# Altium PCB ADAS_ECU_MB_revA.PcbDoc (part 5 of 5)
Units mm, origin at the board's own origin, x right, y up, seen from the top; angles counter-clockwise.
Board outline 180 x 120 mm, 6 copper layers (Top Layer, Mid Layer 1, Mid Layer 2, Mid Layer 3, Mid Layer 4, Bottom Layer), stack 1.554 mm thick; 452 components, 370 nets, 4018 pads, 80 vias.
Unrouted connection lines stored in the file: 869.
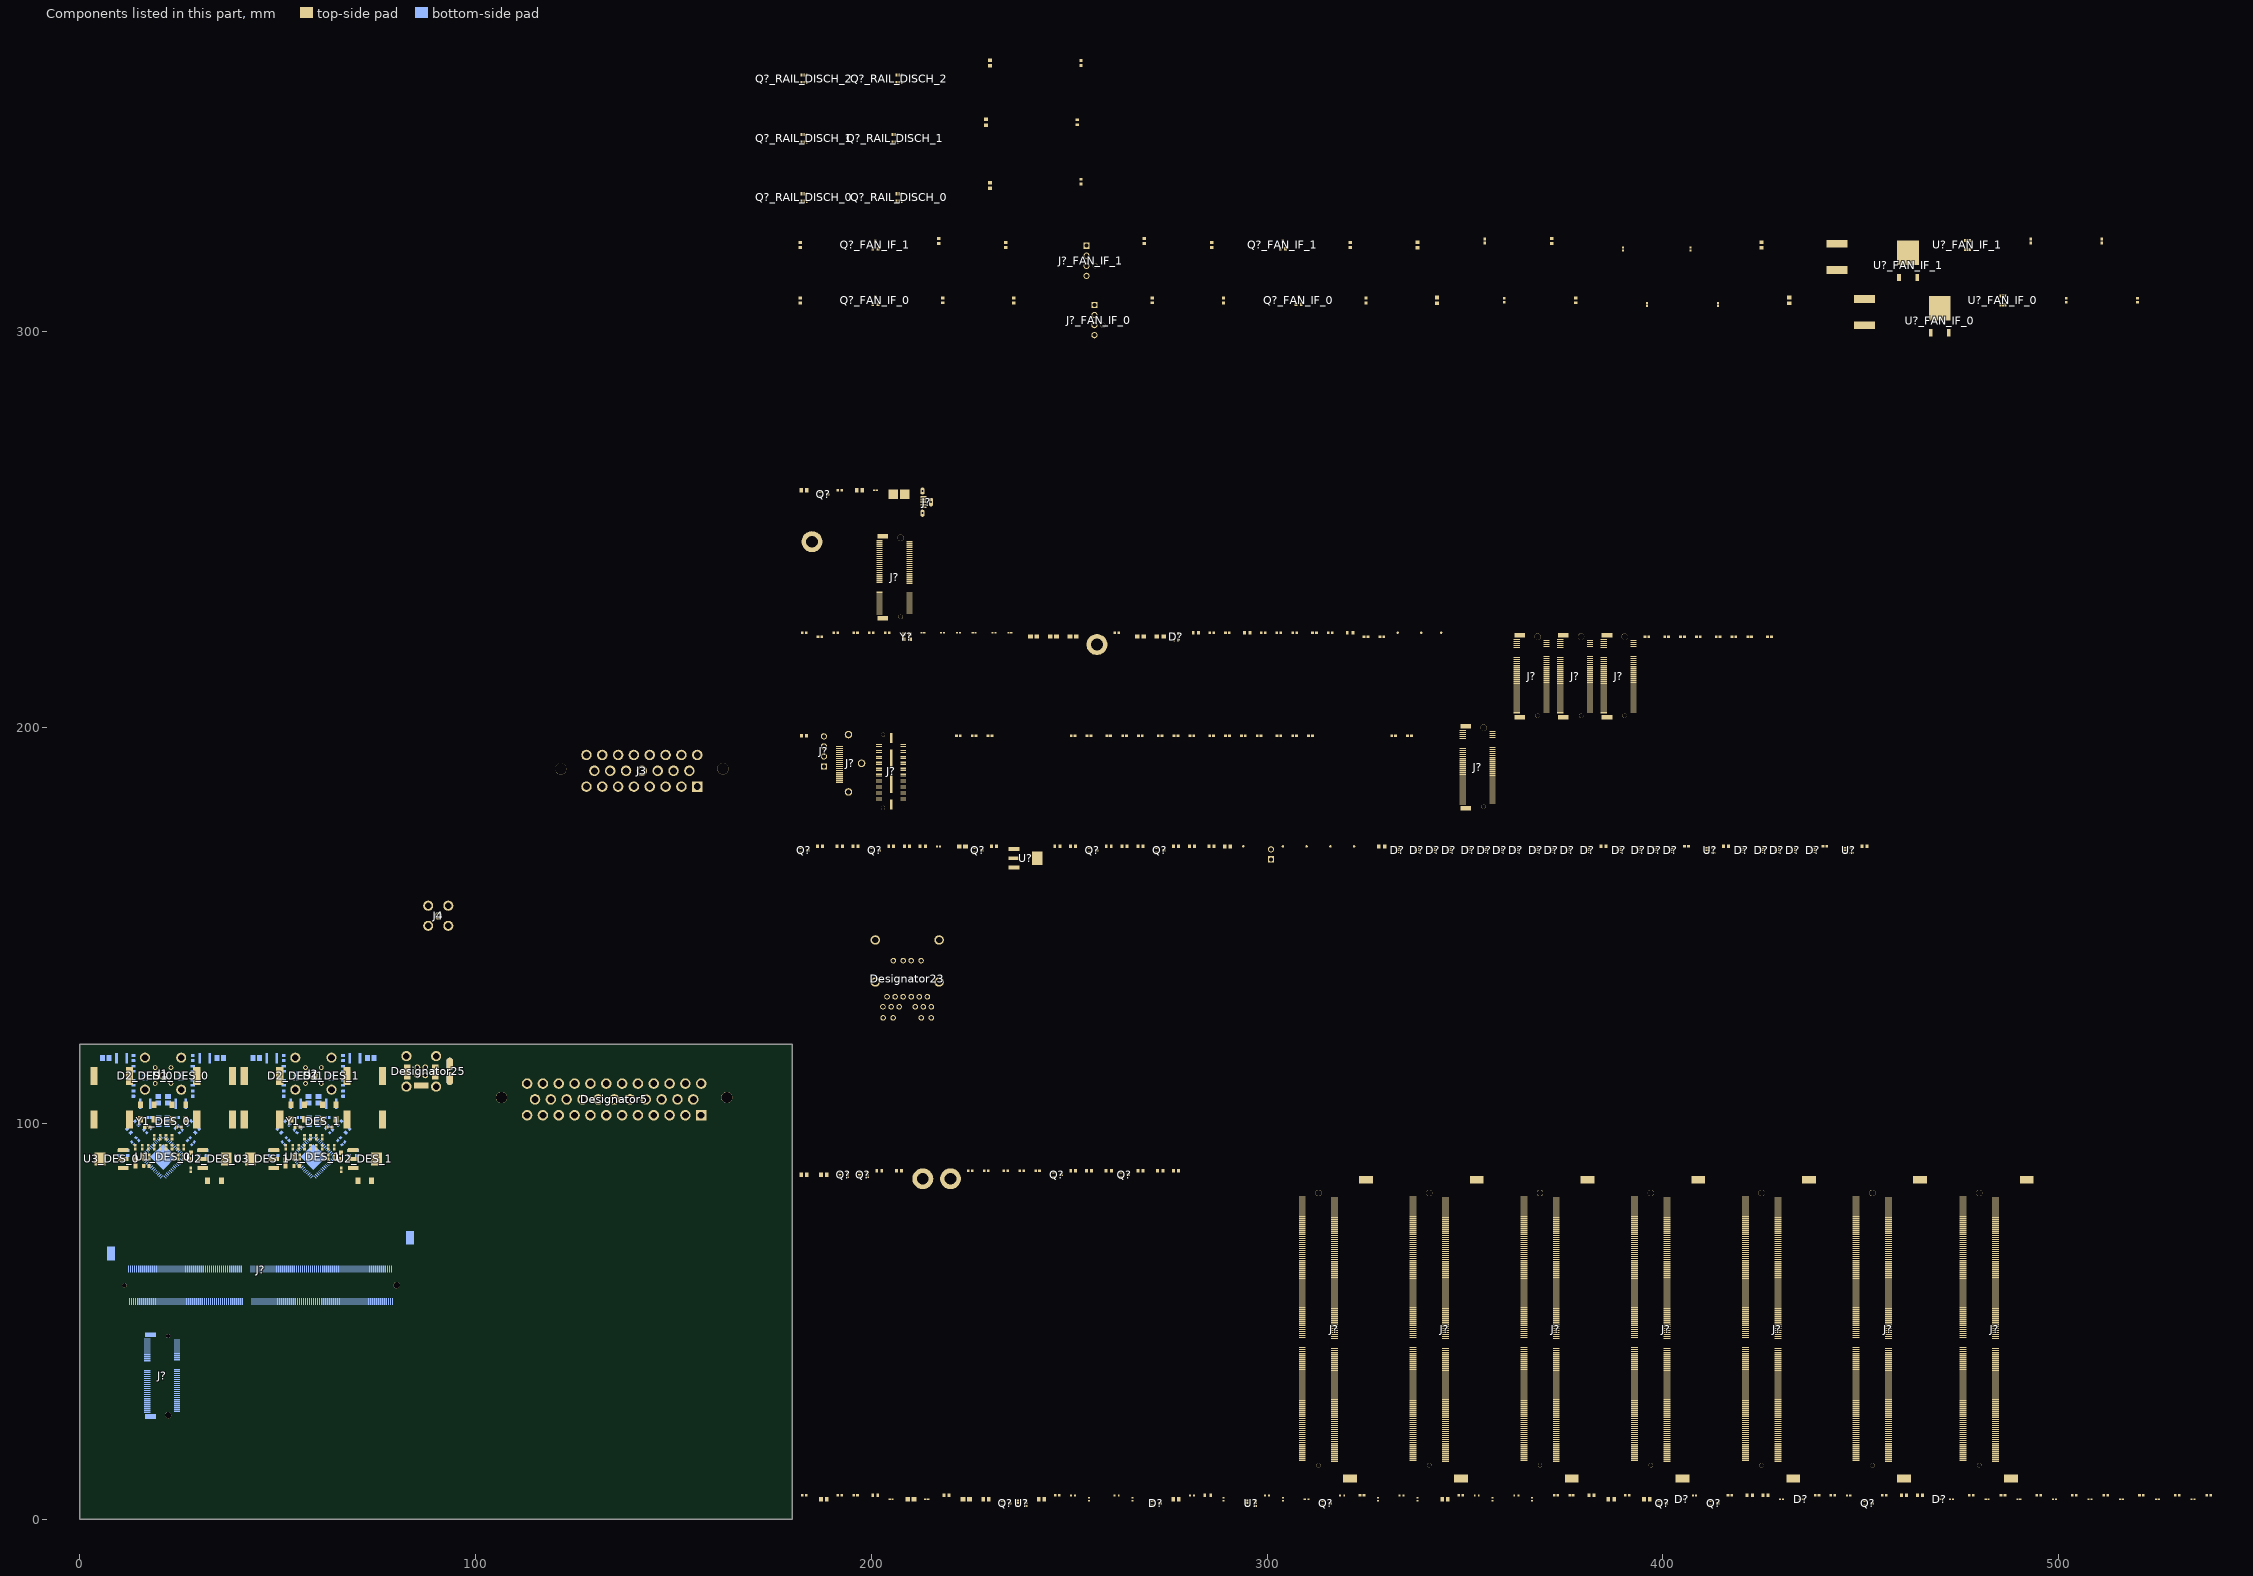
[diagram p4: the components of this part, seen from the top]

## Via types
v1: diameter 0.5, hole 0.2, Top Layer to Bottom Layer, 32 vias
v2: diameter 0.5, hole 0.3, Top Layer to Bottom Layer, 30 vias
v3: diameter 0.7, hole 0.5, Top Layer to Bottom Layer, 16 vias
v4: diameter 1.2, hole 1.2, Top Layer to Bottom Layer, 2 vias

## Nets (pads, with @x,y where several pads share a name; then routed paths per layer and width w, separated by ;. In a path a pad name is that pad's centre, name@x,y a point inside that pad or via, vN(x,y) a via of type N, cw(c..) or ccw(c..) an arc to the next point about the centre after c; other vN are vias at no path point) (continued)
pads on no net: C?.1@186.522,223 C?.1@221.522,198 C?.1@225.522,198 C?.1@229.522,198 C?.1@250.522,198 C?.1@254.522,198 C?.1@259.522,198 C?.1@263.522,198 C?.1@267.522,198 C?.1@272.522,198 C?.1@276.522,198 C?.1@280.522,198 C?.1@285.522,198 C?.1@289.522,198 C?.1@293.522,198 C?.1@297.522,198 C?.1@302.522,198 C?.1@306.522,198 C?.1@310.522,198 C?.1@324.522,223 C?.1@328.522,223 C?.1@331.522,198 C?.1@335.522,198 C?.1@395.522,223 C?.1@400.522,223 C?.1@404.522,223 C?.1@407.6,6 C?.1@408.522,223 C?.1@413.522,223 C?.1@417.522,223 C?.1@421.522,223 C?.1@426.522,223 C?.2@222.479,198 C?.2@226.479,198 C?.2@230.479,198 C?.2@251.479,198 C?.2@255.479,198 C?.2@260.479,198 C?.2@264.479,198 C?.2@268.479,198 C?.2@273.479,198 C?.2@277.479,198 C?.2@281.479,198 C?.2@286.479,198 C?.2@290.479,198 C?.2@294.479,198 C?.2@298.479,198 C?.2@303.479,198 C?.2@307.479,198 C?.2@311.479,198 C?.2@332.479,198 C?.2@336.479,198 C?_FAN_IF_0.2@396,307.367 C?_FAN_IF_1.2@390,321.367 D1_DES_0.2 D1_DES_0.4 D1_DES_0.7 D1_DES_0.9 D1_DES_1.2 D1_DES_1.4 D1_DES_1.7 D1_DES_1.9 D2_DES_0.2 D2_DES_0.4 D2_DES_0.7 D2_DES_0.9 D2_DES_1.2 D2_DES_1.4 D2_DES_1.7 D2_DES_1.9 D?.1@271.05,4.65 D?.1@380.583,170 D?.2@380.583,169.5 D?.3@277.45,222.2 D?.9@381.418,169.5 D?.10@381.418,170 Designator5. Designator5.1 Designator5.2 Designator5.3 Designator5.4 Designator5.5 Designator5.6 Designator5.7 Designator5.8 Designator5.9 Designator5.10 Designator5.11 Designator5.12 Designator5.13 Designator5.14 Designator5.15 Designator5.16 Designator5.17 Designator5.18 Designator5.19 Designator5.20 Designator5.21 Designator5.22 Designator5.23 Designator5.24 Designator5.25 Designator5.26 Designator5.27 Designator5.28 Designator5.29 Designator5.30 Designator5.31 Designator5.32 Designator5.33 Designator5.34 Designator5.35 Designator23.1 Designator23.2 Designator23.3 Designator23.4 Designator23.5 Designator23.6 Designator23.7 Designator23.8 Designator23.9 Designator23.10 Designator23.11 Designator23.12 Designator23.13 Designator23.14 Designator23.15 Designator23.16 Designator23.MH1 Designator23.MH2 Designator23.MH3 Designator23.MH4 Designator23.MH5 Designator23.MH6 Designator23.U1 Designator23.U2 Designator23.U3 Designator23.U4 Designator25. Designator25.1 Designator25.2 Designator25.3 Designator25.4 Designator25.5 Designator25.6 Designator25.7 Designator25.8 Designator25.9 Designator25.10 Designator25.11 F?_FAN_IF_0.2 F?_FAN_IF_1.2 FB?.2@266,5.4 FB?.2@289,5.4 FB?.2@304,5.4 FB?.2@328,5.4 FB?.2@338,5.4 FB?.2@357,5.4 FB?.2@367,5.4 J3. J3.1 J3.2 J3.3 J3.4 J3.5 J3.6 J3.7 J3.8 J3.9 J3.10 J3.11 J3.12 J3.13 J3.14 J3.15 J3.16 J3.17 J3.18 J3.19 J3.20 J3.21 J3.22 J3.23 J4.1 J?. J?.01 J?.1@17,45.5 J?.1@202.1,228.75 J?.1@308.9,81.375 J?.1@336.9,81.375 J?.1@363.1,203.75 J?.1@364.9,81.375 J?.1@374.1,203.75 J?.1@385.1,203.75 J?.1@392.9,81.375 J?.1@420.9,81.375 J?.1@448.9,81.375 J?.1@475.901,81.375 J?.02 J?.2@24.55,45.25 J?.2@78.75,63.2 J?.2@209.65,229 J?.2@213.175,256.35 J?.2@345.1,81.125 J?.2@357,181 J?.2@373.1,81.125 J?.2@381.65,204 J?.2@392.65,204 J?.2@401.1,81.125 J?.2@429.1,81.125 J?.2@457.1,81.125 J?.2@484.101,81.125 J?.03 J?.3@17,45 J?.3@188,195.27 J?.3@191.92,194.21 J?.3@202.1,229.25 J?.3@213.175,257 J?.3@308.9,80.875 J?.3@336.9,80.875 J?.3@363.1,204.25 J?.3@364.9,80.875 J?.3@374.1,204.25 J?.3@385.1,204.25 J?.3@392.9,80.875 J?.3@420.9,80.875 J?.3@448.9,80.875 J?.3@475.901,80.875 J?.04 J?.4@24.55,44.75 J?.4@78.25,63.2 J?.4@188,197.81 J?.4@209.65,229.5 J?.4@213.175,257.65 J?.4@345.1,80.625 J?.4@357,181.5 J?.4@373.1,80.625 J?.4@381.65,204.5 J?.4@392.65,204.5 J?.4@401.1,80.625 J?.4@429.1,80.625 J?.4@457.1,80.625 J?.4@484.101,80.625 J?.05 J?.5@17,44.5 J?.5@202.1,229.75 J?.5@308.9,80.375 J?.5@336.9,80.375 J?.5@363.1,204.75 J?.5@364.9,80.375 J?.5@374.1,204.75 J?.5@385.1,204.75 J?.5@392.9,80.375 J?.5@420.9,80.375 J?.5@448.9,80.375 J?.5@475.901,80.375 J?.06 J?.6@24.55,44.25 J?.6@77.75,63.2 J?.6@209.65,230 J?.6@345.1,80.125 J?.6@357,182 J?.6@370.65,205 J?.6@373.1,80.125 J?.6@381.65,205 J?.6@392.65,205 J?.6@401.1,80.125 J?.6@429.1,80.125 J?.6@457.1,80.125 J?.6@484.101,80.125 J?.07 J?.7@17,44 J?.7@202.1,230.25 J?.7@308.9,79.875 J?.7@336.9,79.875 J?.7@363.1,205.25 J?.7@364.9,79.875 J?.7@374.1,205.25 J?.7@385.1,205.25 J?.7@392.9,79.875 J?.7@420.9,79.875 J?.7@448.9,79.875 J?.7@475.901,79.875 J?.08 J?.8@24.55,43.75 J?.8@77.25,63.2 J?.8@209.65,230.5 J?.8@345.1,79.625 J?.8@357,182.5 J?.8@370.65,205.5 J?.8@373.1,79.625 J?.8@381.65,205.5 J?.8@392.65,205.5 J?.8@401.1,79.625 J?.8@429.1,79.625 J?.8@457.1,79.625 J?.8@484.101,79.625 J?.09 J?.9@17,43.5 J?.9@77,55 J?.9@202.1,230.75 J?.9@308.9,79.375 J?.9@336.9,79.375 J?.9@363.1,205.75 J?.9@364.9,79.375 J?.9@374.1,205.75 J?.9@385.1,205.75 J?.9@392.9,79.375 J?.9@420.9,79.375 J?.9@448.9,79.375 J?.9@475.901,79.375 J?.10@24.55,43.25 J?.10@76.75,63.2 J?.10@208.09,184.75 J?.10@209.65,231 J?.10@345.1,79.125 J?.10@357,183 J?.10@373.1,79.125 J?.10@381.65,206 J?.10@392.65,206 J?.10@401.1,79.125 J?.10@429.1,79.125 J?.10@457.1,79.125 J?.10@484.101,79.125 J?.11@17,43 J?.11@76.5,55 J?.11@201.91,185.25 J?.11@202.1,231.25 J?.11@308.9,78.875 J?.11@336.9,78.875 J?.11@363.1,206.25 J?.11@364.9,78.875 J?.11@374.1,206.25 J?.11@385.1,206.25 J?.11@392.9,78.875 J?.11@420.9,78.875 J?.11@448.9,78.875 J?.11@475.901,78.875 J?.12@24.55,42.75 J?.12@76.25,63.2 J?.12@208.09,185.25 J?.12@209.65,231.5 J?.12@345.1,78.625 J?.12@357,183.5 J?.12@373.1,78.625 J?.12@381.65,206.5 J?.12@392.65,206.5 J?.12@401.1,78.625 J?.12@429.1,78.625 J?.12@457.1,78.625 J?.12@484.101,78.625 J?.13@17,42.5 J?.13@201.91,186.25 J?.13@202.1,231.75 J?.13@308.9,78.375 J?.13@336.9,78.375 J?.13@363.1,206.75 J?.13@364.9,78.375 J?.13@374.1,206.75 J?.13@385.1,206.75 J?.13@392.9,78.375 J?.13@420.9,78.375 J?.13@448.9,78.375 J?.13@475.901,78.375 J?.14@24.55,42.25 J?.14@75.75,63.2 J?.14@191.92,188.71 J?.14@208.09,186.25 J?.14@209.65,232 J?.14@345.1,78.125 J?.14@357,184 J?.14@373.1,78.125 J?.14@381.65,207 J?.14@392.65,207 J?.14@401.1,78.125 J?.14@429.1,78.125 J?.14@457.1,78.125 J?.14@484.101,78.125 J?.15@17,42 J?.15@201.91,186.75 J?.15@202.1,232.25 J?.15@308.9,77.875 J?.15@336.9,77.875 J?.15@363.1,207.25 J?.15@364.9,77.875 J?.15@374.1,207.25 J?.15@385.1,207.25 J?.15@392.9,77.875 J?.15@420.9,77.875 J?.15@448.9,77.875 J?.15@475.901,77.875 J?.16@24.55,41.75 J?.16@75.25,63.2 J?.16@208.09,186.75 J?.16@209.65,232.5 J?.16@345.1,77.625 J?.16@357,184.5 J?.16@373.1,77.625 J?.16@381.65,207.5 J?.16@392.65,207.5 J?.16@401.1,77.625 J?.16@429.1,77.625 J?.16@457.1,77.625 J?.16@484.101,77.625 J?.17@17,41.5 J?.17@201.91,187.75 J?.17@202.1,232.75 J?.17@308.9,77.375 J?.17@336.9,77.375 J?.17@363.1,207.75 J?.17@364.9,77.375 J?.17@374.1,207.75 J?.17@385.1,207.75 J?.17@392.9,77.375 J?.17@420.9,77.375 J?.17@448.9,77.375 J?.17@475.901,77.375 J?.18@24.55,41.25 J?.18@74.75,63.2 J?.18@208.09,187.75 J?.18@209.65,233 J?.18@345.1,77.125 J?.18@357,185 J?.18@373.1,77.125 J?.18@381.65,208 J?.18@392.65,208 J?.18@401.1,77.125 J?.18@429.1,77.125 J?.18@457.1,77.125 J?.18@484.101,77.125 J?.19@17,41 J?.19@201.91,188.25 J?.19@202.1,233.25 J?.19@308.9,76.875 J?.19@336.9,76.875 J?.19@363.1,208.25 J?.19@364.9,76.875 J?.19@374.1,208.25 J?.19@385.1,208.25 J?.19@392.9,76.875 J?.19@420.9,76.875 J?.19@448.9,76.875 J?.19@475.901,76.875 J?.20@24.55,40.75 J?.20@74.25,63.2 J?.20@208.09,188.25 J?.20@209.65,233.5 J?.20@345.1,76.625 J?.20@357,185.5 J?.20@370.65,208.5 J?.20@373.1,76.625 J?.20@381.65,208.5 J?.20@392.65,208.5 J?.20@401.1,76.625 J?.20@429.1,76.625 J?.20@457.1,76.625 J?.20@484.101,76.625 J?.21@17,40.5 J?.21@201.91,189.25 J?.21@202.1,233.75 J?.21@308.9,76.375 J?.21@336.9,76.375 J?.21@363.1,208.75 J?.21@364.9,76.375 J?.21@374.1,208.75 J?.21@385.1,208.75 J?.21@392.9,76.375 J?.21@420.9,76.375 J?.21@448.9,76.375 J?.21@475.901,76.375 J?.22@24.55,40.25 J?.22@73.75,63.2 J?.22@208.09,189.25 J?.22@209.65,234 J?.22@345.1,76.125 J?.22@357,186 J?.22@370.65,209 J?.22@373.1,76.125 J?.22@381.65,209 J?.22@392.65,209 J?.22@401.1,76.125 J?.22@429.1,76.125 J?.22@457.1,76.125 J?.22@484.101,76.125 J?.23@17,40 J?.23@201.91,189.75 J?.23@202.1,234.25 J?.23@308.9,75.875 J?.23@336.9,75.875 J?.23@363.1,209.25 J?.23@364.9,75.875 J?.23@374.1,209.25 J?.23@385.1,209.25 J?.23@392.9,75.875 J?.23@420.9,75.875 J?.23@448.9,75.875 J?.23@475.901,75.875 J?.24@73.25,63.2 J?.24@208.09,189.75 J?.24@345.1,75.625 J?.24@357,186.5 J?.24@370.65,209.5 J?.24@373.1,75.625 J?.24@381.65,209.5 J?.24@392.65,209.5 J?.24@401.1,75.625 J?.24@429.1,75.625 J?.24@457.1,75.625 J?.24@484.101,75.625 J?.25@201.91,190.75 J?.25@308.9,75.375 J?.25@336.9,75.375 J?.25@363.1,209.75 J?.25@364.9,75.375 J?.25@374.1,209.75 J?.25@385.1,209.75 J?.25@392.9,75.375 J?.25@420.9,75.375 J?.25@448.9,75.375 J?.25@475.901,75.375 J?.26@72.75,63.2 J?.26@208.09,190.75 J?.26@345.1,75.125 J?.26@357,187 J?.26@370.65,210 J?.26@373.1,75.125 J?.26@381.65,210 J?.26@392.65,210 J?.26@401.1,75.125 J?.26@429.1,75.125 J?.26@457.1,75.125 J?.26@484.101,75.125 J?.27@72.5,55 J?.27@201.91,191.25 J?.27@308.9,74.875 J?.27@336.9,74.875 J?.27@363.1,210.25 J?.27@364.9,74.875 J?.27@374.1,210.25 J?.27@385.1,210.25 J?.27@392.9,74.875 J?.27@420.9,74.875 J?.27@448.9,74.875 J?.27@475.901,74.875 J?.28@72.25,63.2 J?.28@208.09,191.25 J?.28@345.1,74.625 J?.28@357,187.5 J?.28@370.65,210.5 J?.28@373.1,74.625 J?.28@381.65,210.5 J?.28@392.65,210.5 J?.28@401.1,74.625 J?.28@429.1,74.625 J?.28@457.1,74.625 J?.28@484.101,74.625 J?.29@72,55 J?.29@201.91,192.25 J?.29@308.9,74.375 J?.29@336.9,74.375 J?.29@363.1,210.75 J?.29@364.9,74.375 J?.29@374.1,210.75 J?.29@385.1,210.75 J?.29@392.9,74.375 J?.29@420.9,74.375 J?.29@448.9,74.375 J?.29@475.901,74.375 J?.30@71.75,63.2 J?.30@208.09,192.25 J?.30@345.1,74.125 J?.30@357,188 J?.30@370.65,211 J?.30@373.1,74.125 J?.30@381.65,211 J?.30@392.65,211 J?.30@401.1,74.125 J?.30@429.1,74.125 J?.30@457.1,74.125 J?.30@484.101,74.125 J?.31@201.91,192.75 J?.31@308.9,73.875 J?.31@336.9,73.875 J?.31@363.1,211.25 J?.31@364.9,73.875 J?.31@374.1,211.25 J?.31@385.1,211.25 J?.31@392.9,73.875 J?.31@420.9,73.875 J?.31@448.9,73.875 J?.31@475.901,73.875 J?.32@24.55,37.75 J?.32@71.25,63.2 J?.32@208.09,192.75 J?.32@209.65,236.5 J?.32@345.1,73.625 J?.32@357,188.5 J?.32@370.65,211.5 J?.32@373.1,73.625 J?.32@381.65,211.5 J?.32@392.65,211.5 J?.32@401.1,73.625 J?.32@429.1,73.625 J?.32@457.1,73.625 J?.32@484.101,73.625 J?.33@17,37.5 J?.33@201.91,193.75 J?.33@202.1,236.75 J?.33@308.9,73.375 J?.33@336.9,73.375 J?.33@363.1,211.75 J?.33@364.9,73.375 J?.33@374.1,211.75 J?.33@385.1,211.75 J?.33@392.9,73.375 J?.33@420.9,73.375 J?.33@448.9,73.375 J?.33@475.901,73.375 J?.34@24.55,37.25 J?.34@70.75,63.2 J?.34@208.09,193.75 J?.34@209.65,237 J?.34@345.1,73.125 J?.34@357,189 J?.34@370.65,212 J?.34@373.1,73.125 J?.34@381.65,212 J?.34@392.65,212 J?.34@401.1,73.125 J?.34@429.1,73.125 J?.34@457.1,73.125 J?.34@484.101,73.125 J?.35@17,37 J?.35@201.91,194.25 J?.35@202.1,237.25 J?.35@308.9,72.875 J?.35@336.9,72.875 J?.35@363.1,212.25 J?.35@364.9,72.875 J?.35@374.1,212.25 J?.35@385.1,212.25 J?.35@392.9,72.875 J?.35@420.9,72.875 J?.35@448.9,72.875 J?.35@475.901,72.875 J?.36@24.55,36.75 J?.36@70.25,63.2 J?.36@208.09,194.25 J?.36@209.65,237.5 J?.36@345.1,72.625 J?.36@357,189.5 J?.36@370.65,212.5 J?.36@373.1,72.625 J?.36@381.65,212.5 J?.36@392.65,212.5 J?.36@401.1,72.625 J?.36@429.1,72.625 J?.36@457.1,72.625 J?.36@484.101,72.625 J?.37@17,36.5 J?.37@201.91,195.25 J?.37@202.1,237.75 J?.37@308.9,72.375 J?.37@336.9,72.375 J?.37@349.45,189.75 J?.37@363.1,212.75 J?.37@364.9,72.375 J?.37@385.1,212.75 J?.37@392.9,72.375 J?.37@420.9,72.375 J?.37@448.9,72.375 J?.37@475.901,72.375 J?.38@24.55,36.25 J?.38@69.75,63.2 J?.38@208.09,195.25 J?.38@209.65,238 J?.38@345.1,72.125 J?.38@357,190 J?.38@370.65,213 J?.38@373.1,72.125 J?.38@381.65,213 J?.38@392.65,213 J?.38@401.1,72.125 J?.38@429.1,72.125 J?.38@457.1,72.125 J?.38@484.101,72.125 J?.39@17,36 J?.39@69.5,55 J?.39@201.91,195.75 J?.39@202.1,238.25 J?.39@308.9,71.875 J?.39@336.9,71.875 J?.39@349.45,190.25 J?.39@363.1,213.25 J?.39@364.9,71.875 J?.39@385.1,213.25 J?.39@392.9,71.875 J?.39@420.9,71.875 J?.39@448.9,71.875 J?.39@475.901,71.875 J?.40@24.55,35.75 J?.40@69.25,63.2 J?.40@208.09,195.75 J?.40@209.65,238.5 J?.40@317.1,71.625 J?.40@345.1,71.625 J?.40@357,190.5 J?.40@370.65,213.5 J?.40@373.1,71.625 J?.40@381.65,213.5 J?.40@401.1,71.625 J?.40@429.1,71.625 J?.40@457.1,71.625 J?.40@484.101,71.625 J?.41@17,35.5 J?.41@69,55 J?.41@202.1,238.75 J?.41@308.9,71.375 J?.41@336.9,71.375 J?.41@349.45,190.75 J?.41@363.1,213.75 J?.41@364.9,71.375 J?.41@385.1,213.75 J?.41@392.9,71.375 J?.41@420.9,71.375 J?.41@448.9,71.375 J?.41@475.901,71.375 J?.42@24.55,35.25 J?.42@68.75,63.2 J?.42@209.65,239 J?.42@317.1,71.125 J?.42@345.1,71.125 J?.42@357,191 J?.42@370.65,214 J?.42@373.1,71.125 J?.42@381.65,214 J?.42@401.1,71.125 J?.42@429.1,71.125 J?.42@457.1,71.125 J?.42@484.101,71.125 J?.43@17,35 J?.43@202.1,239.25 J?.43@308.9,70.875 J?.43@336.9,70.875 J?.43@349.45,191.25 J?.43@363.1,214.25 J?.43@364.9,70.875 J?.43@385.1,214.25 J?.43@392.9,70.875 J?.43@420.9,70.875 J?.43@448.9,70.875 J?.43@475.901,70.875 J?.44@24.55,34.75 J?.44@68.25,63.2 J?.44@209.65,239.5 J?.44@345.1,70.625 J?.44@357,191.5 J?.44@370.65,214.5 J?.44@373.1,70.625 J?.44@381.65,214.5 J?.44@401.1,70.625 J?.44@429.1,70.625 J?.44@457.1,70.625 J?.44@484.101,70.625 J?.45@17,34.5 J?.45@68,55 J?.45@202.1,239.75 J?.45@308.9,70.375 J?.45@336.9,70.375 J?.45@349.45,191.75 J?.45@363.1,214.75 J?.45@364.9,70.375 J?.45@385.1,214.75 J?.45@392.9,70.375 J?.45@420.9,70.375 J?.45@448.9,70.375 J?.45@475.901,70.375 J?.46 J?.47@17,34 J?.47@67.5,55 J?.47@202.1,240.25 J?.47@308.9,69.875 J?.47@336.9,69.875 J?.47@349.45,192.25 J?.47@363.1,215.25 J?.47@364.9,69.875 J?.47@385.1,215.25 J?.47@392.9,69.875 J?.47@420.9,69.875 J?.47@448.9,69.875 J?.47@475.901,69.875 J?.48 J?.49@17,33.5 J?.49@202.1,240.75 J?.49@308.9,69.375 J?.49@336.9,69.375 J?.49@349.45,192.75 J?.49@363.1,215.75 J?.49@364.9,69.375 J?.49@385.1,215.75 J?.49@392.9,69.375 J?.49@420.9,69.375 J?.49@448.9,69.375 J?.49@475.901,69.375 J?.50@24.55,33.25 J?.50@66.75,63.2 J?.50@209.65,241 J?.50@345.1,69.125 J?.50@357,193 J?.50@370.65,216 J?.50@373.1,69.125 J?.50@381.65,216 J?.50@401.1,69.125 J?.50@429.1,69.125 J?.50@457.1,69.125 J?.50@484.101,69.125 J?.51@17,33 J?.51@66.5,55 J?.51@202.1,241.25 J?.51@308.9,68.875 J?.51@336.9,68.875 J?.51@349.45,193.25 J?.51@363.1,216.25 J?.51@364.9,68.875 J?.51@385.1,216.25 J?.51@392.9,68.875 J?.51@420.9,68.875 J?.51@448.9,68.875 J?.51@475.901,68.875 J?.52@24.55,32.75 J?.52@66.25,63.2 J?.52@209.65,241.5 J?.52@317.1,68.625 J?.52@345.1,68.625 J?.52@357,193.5 J?.52@370.65,216.5 J?.52@373.1,68.625 J?.52@381.65,216.5 J?.52@401.1,68.625 J?.52@429.1,68.625 J?.52@457.1,68.625 J?.52@484.101,68.625 J?.53@17,32.5 J?.53@66,55 J?.53@202.1,241.75 J?.53@308.9,68.375 J?.53@336.9,68.375 J?.53@349.45,193.75 J?.53@363.1,216.75 J?.53@364.9,68.375 J?.53@385.1,216.75 J?.53@392.9,68.375 J?.53@420.9,68.375 J?.53@448.9,68.375 J?.53@475.901,68.375 J?.54@24.55,32.25 J?.54@65.75,63.2 J?.54@209.65,242 J?.54@317.1,68.125 J?.54@345.1,68.125 J?.54@357,194 J?.54@370.65,217 J?.54@373.1,68.125 J?.54@381.65,217 J?.54@401.1,68.125 J?.54@429.1,68.125 J?.54@457.1,68.125 J?.54@484.101,68.125 J?.55@17,32 J?.55@202.1,242.25 J?.55@308.9,67.875 J?.55@336.9,67.875 J?.55@349.45,194.25 J?.55@363.1,217.25 J?.55@364.9,67.875 J?.55@385.1,217.25 J?.55@392.9,67.875 J?.55@420.9,67.875 J?.55@448.9,67.875 J?.55@475.901,67.875 J?.56@24.55,31.75 J?.56@65.25,63.2 J?.56@209.65,242.5 J?.56@345.1,67.625 J?.56@357,194.5 J?.56@370.65,217.5 J?.56@373.1,67.625 J?.56@381.65,217.5 J?.56@392.65,217.5 J?.56@401.1,67.625 J?.56@429.1,67.625 J?.56@457.1,67.625 J?.56@484.101,67.625 J?.57@17,31.5 J?.57@65,55 J?.57@202.1,242.75 J?.57@308.9,67.375 J?.57@336.9,67.375 J?.57@349.45,194.75 J?.57@363.1,217.75 J?.57@364.9,67.375 J?.57@385.1,217.75 J?.57@392.9,67.375 J?.57@420.9,67.375 J?.57@448.9,67.375 J?.57@475.901,67.375 J?.58 J?.59 J?.60 J?.61@17,30.5 J?.61@202.1,243.75 J?.61@308.9,66.375 J?.61@336.9,66.375 J?.61@364.9,66.375 J?.61@392.9,66.375 J?.61@420.9,66.375 J?.61@448.9,66.375 J?.61@475.901,66.375 J?.62@24.55,30.25 J?.62@63.75,63.2 J?.62@345.1,66.125 J?.62@373.1,66.125 J?.62@401.1,66.125 J?.62@429.1,66.125 J?.62@457.1,66.125 J?.62@484.101,66.125 J?.63@17,30 J?.63@202.1,244.25 J?.63@308.9,65.875 J?.63@336.9,65.875 J?.63@364.9,65.875 J?.63@392.9,65.875 J?.63@420.9,65.875 J?.63@448.9,65.875 J?.63@475.901,65.875 J?.64 J?.65@17,29.5 J?.65@202.1,244.75 J?.65@308.9,65.375 J?.65@336.9,65.375 J?.65@364.9,65.375 J?.65@392.9,65.375 J?.65@420.9,65.375 J?.65@448.9,65.375 J?.65@475.901,65.375 J?.66 J?.67@17,29 J?.67@202.1,245.25 J?.67@308.9,64.875 J?.67@336.9,64.875 J?.67@349.45,197.25 J?.67@363.1,220.25 J?.67@364.9,64.875 J?.67@374.1,220.25 J?.67@385.1,220.25 J?.67@392.9,64.875 J?.67@420.9,64.875 J?.67@448.9,64.875 J?.67@475.901,64.875 J?.68@24.55,28.75 J?.68@62.25,63.2 J?.68@209.65,245.5 J?.68@345.1,64.625 J?.68@357,197.5 J?.68@370.65,220.5 J?.68@373.1,64.625 J?.68@381.65,220.5 J?.68@401.1,64.625 J?.68@429.1,64.625 J?.68@457.1,64.625 J?.68@484.101,64.625 J?.69@17,28.5 J?.69@202.1,245.75 J?.69@308.9,64.375 J?.69@336.9,64.375 J?.69@349.45,197.75 J?.69@363.1,220.75 J?.69@364.9,64.375 J?.69@374.1,220.75 J?.69@385.1,220.75 J?.69@392.9,64.375 J?.69@420.9,64.375 J?.69@448.9,64.375 J?.69@475.901,64.375 J?.70@24.55,28.25 J?.70@61.75,63.2 J?.70@209.65,246 J?.70@317.1,64.125 J?.70@345.1,64.125 J?.70@357,198 J?.70@370.65,221 J?.70@373.1,64.125 J?.70@381.65,221 J?.70@401.1,64.125 J?.70@429.1,64.125 J?.70@457.1,64.125 J?.70@484.101,64.125 J?.71@17,28 J?.71@202.1,246.25 J?.71@308.9,63.875 J?.71@336.9,63.875 J?.71@349.45,198.25 J?.71@363.1,221.25 J?.71@364.9,63.875 J?.71@385.1,221.25 J?.71@392.9,63.875 J?.71@420.9,63.875 J?.71@448.9,63.875 J?.71@475.901,63.875 J?.72@24.55,27.75 J?.72@61.25,63.2 J?.72@317.1,63.625 J?.72@345.1,63.625 J?.72@357,198.5 J?.72@370.65,221.5 J?.72@373.1,63.625 J?.72@381.65,221.5 J?.72@401.1,63.625 J?.72@429.1,63.625 J?.72@457.1,63.625 J?.72@484.101,63.625 J?.73@17,27.5 J?.73@202.1,246.75 J?.73@308.9,63.375 J?.73@336.9,63.375 J?.73@349.45,198.75 J?.73@363.1,221.75 J?.73@364.9,63.375 J?.73@385.1,221.75 J?.73@392.9,63.375 J?.73@420.9,63.375 J?.73@448.9,63.375 J?.73@475.901,63.375 J?.74@24.55,27.25 J?.74@60.75,63.2 J?.74@345.1,63.125 J?.74@357,199 J?.74@370.65,222 J?.74@373.1,63.125 J?.74@381.65,222 J?.74@401.1,63.125 J?.74@429.1,63.125 J?.74@457.1,63.125 J?.74@484.101,63.125 J?.75@17,27 J?.75@202.1,247.25 J?.75@308.9,62.875 J?.75@336.9,62.875 J?.75@349.45,199.25 J?.75@363.1,222.25 J?.75@364.9,62.875 J?.75@385.1,222.25 J?.75@392.9,62.875 J?.75@420.9,62.875 J?.75@448.9,62.875 J?.75@475.901,62.875 J?.76@17.775,46.6 J?.76@60.25,63.2 J?.76@317.1,62.625 J?.76@345.1,62.625 J?.76@350.225,179.65 J?.76@363.875,202.65 J?.76@373.1,62.625 J?.76@374.875,202.65 J?.76@401.1,62.625 J?.76@429.1,62.625 J?.76@457.1,62.625 J?.76@484.101,62.625 J?.77@17.775,25.9 J?.77@308.9,62.375 J?.77@336.9,62.375 J?.77@350.225,200.35 J?.77@363.875,223.35 J?.77@364.9,62.375 J?.77@385.875,223.35 J?.77@392.9,62.375 J?.77@420.9,62.375 J?.77@448.9,62.375 J?.77@475.901,62.375 J?.78 J?.79@308.9,61.875 J?.79@336.9,61.875 J?.79@364.9,61.875 J?.79@392.9,61.875 J?.79@420.9,61.875 J?.79@448.9,61.875 J?.79@475.901,61.875 J?.80@59.25,63.2 J?.80@345.1,61.625 J?.80@373.1,61.625 J?.80@401.1,61.625 J?.80@429.1,61.625 J?.80@457.1,61.625 J?.80@484.101,61.625 J?.81@59,55 J?.81@308.9,61.375 J?.81@364.9,61.375 J?.81@392.9,61.375 J?.81@420.9,61.375 J?.81@448.9,61.375 J?.81@475.901,61.375 J?.82 J?.83@58.5,55 J?.83@308.9,60.875 J?.83@364.9,60.875 J?.83@392.9,60.875 J?.83@420.9,60.875 J?.83@448.9,60.875 J?.83@475.901,60.875 J?.84 J?.85@58,55 J?.85@308.9,60.375 J?.85@364.9,60.375 J?.85@392.9,60.375 J?.85@420.9,60.375 J?.85@448.9,60.375 J?.85@475.901,60.375 J?.86@57.75,63.2 J?.86@317.1,60.125 J?.86@345.1,60.125 J?.86@401.1,60.125 J?.86@429.1,60.125 J?.86@457.1,60.125 J?.86@484.101,60.125 J?.87@57.5,55 J?.87@308.9,59.875 J?.87@364.9,59.875 J?.87@392.9,59.875 J?.87@420.9,59.875 J?.87@448.9,59.875 J?.87@475.901,59.875 J?.88 J?.89 J?.90 J?.91 J?.92 J?.93 J?.94@55.75,63.2 J?.94@317.1,58.125 J?.94@345.1,58.125 J?.94@401.1,58.125 J?.94@429.1,58.125 J?.94@457.1,58.125 J?.94@484.101,58.125 J?.95 J?.96@55.25,63.2 J?.96@317.1,57.625 J?.96@345.1,57.625 J?.96@401.1,57.625 J?.96@429.1,57.625 J?.96@457.1,57.625 J?.96@484.101,57.625 J?.97 J?.98@54.75,63.2 J?.98@317.1,57.125 J?.98@345.1,57.125 J?.98@401.1,57.125 J?.98@429.1,57.125 J?.98@457.1,57.125 J?.98@484.101,57.125 J?.99 J?.100@54.25,63.2 J?.100@317.1,56.625 J?.100@345.1,56.625 J?.100@401.1,56.625 J?.100@429.1,56.625 J?.100@457.1,56.625 J?.100@484.101,56.625 J?.101 J?.102@53.75,63.2 J?.102@317.1,56.125 J?.102@345.1,56.125 J?.102@401.1,56.125 J?.102@429.1,56.125 J?.102@457.1,56.125 J?.102@484.101,56.125 J?.103 J?.104@53.25,63.2 J?.104@317.1,55.625 J?.104@345.1,55.625 J?.104@401.1,55.625 J?.104@429.1,55.625 J?.104@457.1,55.625 J?.104@484.101,55.625 J?.105 J?.106@52.75,63.2 J?.106@317.1,55.125 J?.106@345.1,55.125 J?.106@401.1,55.125 J?.106@429.1,55.125 J?.106@457.1,55.125 J?.106@484.101,55.125 J?.107@52.5,55 J?.107@308.9,54.875 J?.107@364.9,54.875 J?.107@392.9,54.875 J?.107@420.9,54.875 J?.107@448.9,54.875 J?.107@475.901,54.875 J?.108@52.25,63.2 J?.108@317.1,54.625 J?.108@345.1,54.625 J?.108@401.1,54.625 J?.108@429.1,54.625 J?.108@457.1,54.625 J?.108@484.101,54.625 J?.109@52,55 J?.109@308.9,54.375 J?.109@364.9,54.375 J?.109@392.9,54.375 J?.109@420.9,54.375 J?.109@448.9,54.375 J?.109@475.901,54.375 J?.110@51.75,63.2 J?.110@317.1,54.125 J?.110@345.1,54.125 J?.110@401.1,54.125 J?.110@429.1,54.125 J?.110@457.1,54.125 J?.110@484.101,54.125 J?.111@51.5,55 J?.111@308.9,53.875 J?.111@364.9,53.875 J?.111@392.9,53.875 J?.111@420.9,53.875 J?.111@448.9,53.875 J?.111@475.901,53.875 J?.112@51.25,63.2 J?.112@317.1,53.625 J?.112@345.1,53.625 J?.112@401.1,53.625 J?.112@429.1,53.625 J?.112@457.1,53.625 J?.112@484.101,53.625 J?.113@51,55 J?.113@308.9,53.375 J?.113@364.9,53.375 J?.113@392.9,53.375 J?.113@420.9,53.375 J?.113@448.9,53.375 J?.113@475.901,53.375 J?.114@50.75,63.2 J?.114@317.1,53.125 J?.114@345.1,53.125 J?.114@401.1,53.125 J?.114@429.1,53.125 J?.114@457.1,53.125 J?.114@484.101,53.125 J?.115@50.5,55 J?.115@308.9,52.875 J?.115@364.9,52.875 J?.115@392.9,52.875 J?.115@420.9,52.875 J?.115@448.9,52.875 J?.115@475.901,52.875 J?.116 J?.117@50,55 J?.117@308.9,52.375 J?.117@364.9,52.375 J?.117@392.9,52.375 J?.117@420.9,52.375 J?.117@448.9,52.375 J?.117@475.901,52.375 J?.118@49.75,63.2 J?.118@317.1,52.125 J?.118@345.1,52.125 J?.118@401.1,52.125 J?.118@429.1,52.125 J?.118@457.1,52.125 J?.118@484.101,52.125 J?.119@49.5,55 J?.119@308.9,51.875 J?.119@364.9,51.875 J?.119@392.9,51.875 J?.119@420.9,51.875 J?.119@448.9,51.875 J?.119@475.901,51.875 J?.120@49.25,63.2 J?.120@317.1,51.625 J?.120@345.1,51.625 J?.120@401.1,51.625 J?.120@429.1,51.625 J?.120@457.1,51.625 J?.120@484.101,51.625 J?.121 J?.122 J?.123 J?.124@48.25,63.2 J?.124@317.1,50.625 J?.124@345.1,50.625 J?.124@401.1,50.625 J?.124@429.1,50.625 J?.124@457.1,50.625 J?.124@484.101,50.625 J?.125@48,55 J?.125@308.9,50.375 J?.125@364.9,50.375 J?.125@392.9,50.375 J?.125@420.9,50.375 J?.125@448.9,50.375 J?.125@475.901,50.375 J?.126@47.75,63.2 J?.126@317.1,50.125 J?.126@345.1,50.125 J?.126@401.1,50.125 J?.126@429.1,50.125 J?.126@457.1,50.125 J?.126@484.101,50.125 J?.127@47.5,55 J?.127@308.9,49.875 J?.127@364.9,49.875 J?.127@392.9,49.875 J?.127@420.9,49.875 J?.127@448.9,49.875 J?.127@475.901,49.875 J?.128@47.25,63.2 J?.128@317.1,49.625 J?.128@345.1,49.625 J?.128@401.1,49.625 J?.128@429.1,49.625 J?.128@457.1,49.625 J?.128@484.101,49.625 J?.129@47,55 J?.129@308.9,49.375 J?.129@364.9,49.375 J?.129@392.9,49.375 J?.129@420.9,49.375 J?.129@448.9,49.375 J?.129@475.901,49.375 J?.130@46.75,63.2 J?.130@317.1,49.125 J?.130@345.1,49.125 J?.130@401.1,49.125 J?.130@429.1,49.125 J?.130@457.1,49.125 J?.130@484.101,49.125 J?.131@46.5,55 J?.131@308.9,48.875 J?.131@364.9,48.875 J?.131@392.9,48.875 J?.131@420.9,48.875 J?.131@448.9,48.875 J?.131@475.901,48.875 J?.132@46.25,63.2 J?.132@317.1,48.625 J?.132@345.1,48.625 J?.132@401.1,48.625 J?.132@429.1,48.625 J?.132@457.1,48.625 J?.132@484.101,48.625 J?.133@46,55 J?.133@308.9,48.375 J?.133@364.9,48.375 J?.133@392.9,48.375 J?.133@420.9,48.375 J?.133@448.9,48.375 J?.133@475.901,48.375 J?.134@45.75,63.2 J?.134@317.1,48.125 J?.134@345.1,48.125 J?.134@401.1,48.125 J?.134@429.1,48.125 J?.134@457.1,48.125 J?.134@484.101,48.125 J?.135@45.5,55 J?.135@308.9,47.875 J?.135@364.9,47.875 J?.135@392.9,47.875 J?.135@420.9,47.875 J?.135@448.9,47.875 J?.135@475.901,47.875 J?.136@45.25,63.2 J?.136@317.1,47.625 J?.136@345.1,47.625 J?.136@401.1,47.625 J?.136@429.1,47.625 J?.136@457.1,47.625 J?.136@484.101,47.625 J?.137@45,55 J?.137@308.9,47.375 J?.137@364.9,47.375 J?.137@392.9,47.375 J?.137@420.9,47.375 J?.137@448.9,47.375 J?.137@475.901,47.375 J?.138@44.75,63.2 J?.138@317.1,47.125 J?.138@345.1,47.125 J?.138@401.1,47.125 J?.138@429.1,47.125 J?.138@457.1,47.125 J?.138@484.101,47.125 J?.139@44.5,55 J?.139@308.9,46.875 J?.139@364.9,46.875 J?.139@392.9,46.875 J?.139@420.9,46.875 J?.139@448.9,46.875 J?.139@475.901,46.875 J?.140@44.25,63.2 J?.140@317.1,46.625 J?.140@345.1,46.625 J?.140@401.1,46.625 J?.140@429.1,46.625 J?.140@457.1,46.625 J?.140@484.101,46.625 J?.141@44,55 J?.141@308.9,46.375 J?.141@364.9,46.375 J?.141@392.9,46.375 J?.141@420.9,46.375 J?.141@448.9,46.375 J?.141@475.901,46.375 J?.142@43.75,63.2 J?.142@317.1,46.125 J?.142@345.1,46.125 J?.142@401.1,46.125 J?.142@429.1,46.125 J?.142@457.1,46.125 J?.142@484.101,46.125 J?.143@43.5,55 J?.143@308.9,45.875 J?.143@364.9,45.875 J?.143@392.9,45.875 J?.143@420.9,45.875 J?.143@448.9,45.875 J?.143@475.901,45.875 J?.144@43.25,63.2 J?.144@317.1,45.625 J?.144@345.1,45.625 J?.144@401.1,45.625 J?.144@429.1,45.625 J?.144@457.1,45.625 J?.144@484.101,45.625 J?.145@41,55 J?.145@308.9,43.375 J?.145@364.9,43.375 J?.145@392.9,43.375 J?.145@420.9,43.375 J?.145@448.9,43.375 J?.145@475.901,43.375 J?.146@40.75,63.2 J?.146@317.1,43.125 J?.146@345.1,43.125 J?.146@401.1,43.125 J?.146@429.1,43.125 J?.146@457.1,43.125 J?.146@484.101,43.125 J?.147@40.5,55 J?.147@308.9,42.875 J?.147@364.9,42.875 J?.147@392.9,42.875 J?.147@420.9,42.875 J?.147@448.9,42.875 J?.147@475.901,42.875 J?.148@40.25,63.2 J?.148@317.1,42.625 J?.148@345.1,42.625 J?.148@401.1,42.625 J?.148@429.1,42.625 J?.148@457.1,42.625 J?.148@484.101,42.625 J?.149@40,55 J?.149@308.9,42.375 J?.149@364.9,42.375 J?.149@392.9,42.375 J?.149@420.9,42.375 J?.149@448.9,42.375 J?.149@475.901,42.375 J?.150@39.75,63.2 J?.150@317.1,42.125 J?.150@345.1,42.125 J?.150@401.1,42.125 J?.150@429.1,42.125 J?.150@457.1,42.125 J?.150@484.101,42.125 J?.151@39.5,55 J?.151@308.9,41.875 J?.151@364.9,41.875 J?.151@392.9,41.875 J?.151@420.9,41.875 J?.151@448.9,41.875 J?.151@475.901,41.875 J?.152@39.25,63.2 J?.152@317.1,41.625 J?.152@345.1,41.625 J?.152@401.1,41.625 J?.152@429.1,41.625 J?.152@457.1,41.625 J?.152@484.101,41.625 J?.153@39,55 J?.153@308.9,41.375 J?.153@364.9,41.375 J?.153@392.9,41.375 J?.153@420.9,41.375 J?.153@448.9,41.375 J?.153@475.901,41.375 J?.154@38.75,63.2 J?.154@317.1,41.125 J?.154@345.1,41.125 J?.154@401.1,41.125 J?.154@429.1,41.125 J?.154@457.1,41.125 J?.154@484.101,41.125 J?.155@38.5,55 J?.155@308.9,40.875 J?.155@364.9,40.875 J?.155@392.9,40.875 J?.155@420.9,40.875 J?.155@448.9,40.875 J?.155@475.901,40.875 J?.156@38.25,63.2 J?.156@317.1,40.625 J?.156@345.1,40.625 J?.156@401.1,40.625 J?.156@429.1,40.625 J?.156@457.1,40.625 J?.156@484.101,40.625 J?.157@38,55 J?.157@308.9,40.375 J?.157@364.9,40.375 J?.157@392.9,40.375 J?.157@420.9,40.375 J?.157@448.9,40.375 J?.157@475.901,40.375 J?.158@37.75,63.2 J?.158@317.1,40.125 J?.158@345.1,40.125 J?.158@401.1,40.125 J?.158@429.1,40.125 J?.158@457.1,40.125 J?.158@484.101,40.125 J?.159@37.5,55 J?.159@308.9,39.875 J?.159@364.9,39.875 J?.159@392.9,39.875 J?.159@420.9,39.875 J?.159@448.9,39.875 J?.159@475.901,39.875 J?.160@37.25,63.2 J?.160@317.1,39.625 J?.160@345.1,39.625 J?.160@401.1,39.625 J?.160@429.1,39.625 J?.160@457.1,39.625 J?.160@484.101,39.625 J?.161@37,55 J?.161@308.9,39.375 J?.161@336.9,39.375 J?.161@364.9,39.375 J?.161@420.9,39.375 J?.161@448.9,39.375 J?.161@475.901,39.375 J?.162@36.75,63.2 J?.162@317.1,39.125 J?.162@345.1,39.125 J?.162@373.1,39.125 J?.162@401.1,39.125 J?.162@457.1,39.125 J?.162@484.101,39.125 J?.163@36.5,55 J?.163@308.9,38.875 J?.163@336.9,38.875 J?.163@364.9,38.875 J?.163@420.9,38.875 J?.163@448.9,38.875 J?.163@475.901,38.875 J?.164@36.25,63.2 J?.164@317.1,38.625 J?.164@345.1,38.625 J?.164@373.1,38.625 J?.164@401.1,38.625 J?.164@457.1,38.625 J?.164@484.101,38.625 J?.165@36,55 J?.165@308.9,38.375 J?.165@336.9,38.375 J?.165@364.9,38.375 J?.165@420.9,38.375 J?.165@448.9,38.375 J?.165@475.901,38.375 J?.166@35.75,63.2 J?.166@317.1,38.125 J?.166@345.1,38.125 J?.166@373.1,38.125 J?.166@401.1,38.125 J?.166@457.1,38.125 J?.166@484.101,38.125 J?.167 J?.168@35.25,63.2 J?.168@317.1,37.625 J?.168@345.1,37.625 J?.168@373.1,37.625 J?.168@401.1,37.625 J?.168@457.1,37.625 J?.168@484.101,37.625 J?.169 J?.170@34.75,63.2 J?.170@317.1,37.125 J?.170@345.1,37.125 J?.170@373.1,37.125 J?.170@401.1,37.125 J?.170@457.1,37.125 J?.170@484.101,37.125 J?.171@34.5,55 J?.171@308.9,36.875 J?.171@336.9,36.875 J?.171@364.9,36.875 J?.171@420.9,36.875 J?.171@448.9,36.875 J?.171@475.901,36.875 J?.172 J?.173 J?.174 J?.175 J?.176@33.25,63.2 J?.176@317.1,35.625 J?.176@345.1,35.625 J?.176@373.1,35.625 J?.176@401.1,35.625 J?.176@457.1,35.625 J?.176@484.101,35.625 J?.177@33,55 J?.177@308.9,35.375 J?.177@336.9,35.375 J?.177@364.9,35.375 J?.177@420.9,35.375 J?.177@448.9,35.375 J?.177@475.901,35.375 J?.178@32.75,63.2 J?.178@317.1,35.125 J?.178@345.1,35.125 J?.178@373.1,35.125 J?.178@401.1,35.125 J?.178@457.1,35.125 J?.178@484.101,35.125 J?.179@32.5,55 J?.179@308.9,34.875 J?.179@336.9,34.875 J?.179@364.9,34.875 J?.179@420.9,34.875 J?.179@448.9,34.875 J?.179@475.901,34.875 J?.180@32.25,63.2 J?.180@317.1,34.625 J?.180@345.1,34.625 J?.180@373.1,34.625 J?.180@401.1,34.625 J?.180@457.1,34.625 J?.180@484.101,34.625 J?.181@32,55 J?.181@308.9,34.375 J?.181@336.9,34.375 J?.181@364.9,34.375 J?.181@420.9,34.375 J?.181@448.9,34.375 J?.181@475.901,34.375 J?.182 J?.183 J?.184@31.25,63.2 J?.184@317.1,33.625 J?.184@345.1,33.625 J?.184@373.1,33.625 J?.184@401.1,33.625 J?.184@457.1,33.625 J?.184@484.101,33.625 J?.185@31,55 J?.185@308.9,33.375 J?.185@336.9,33.375 J?.185@364.9,33.375 J?.185@420.9,33.375 J?.185@448.9,33.375 J?.185@475.901,33.375 J?.186@30.75,63.2 J?.186@317.1,33.125 J?.186@345.1,33.125 J?.186@373.1,33.125 J?.186@401.1,33.125 J?.186@457.1,33.125 J?.186@484.101,33.125 J?.187@30.5,55 J?.187@308.9,32.875 J?.187@336.9,32.875 J?.187@364.9,32.875 J?.187@420.9,32.875 J?.187@448.9,32.875 J?.187@475.901,32.875 J?.188@30.25,63.2 J?.188@317.1,32.625 J?.188@345.1,32.625 J?.188@373.1,32.625 J?.188@401.1,32.625 J?.188@457.1,32.625 J?.188@484.101,32.625 J?.189@30,55 J?.189@308.9,32.375 J?.189@336.9,32.375 J?.189@364.9,32.375 J?.189@420.9,32.375 J?.189@448.9,32.375 J?.189@475.901,32.375 J?.190@29.75,63.2 J?.190@317.1,32.125 J?.190@345.1,32.125 J?.190@373.1,32.125 J?.190@401.1,32.125 J?.190@457.1,32.125 J?.190@484.101,32.125 J?.191@29.5,55 J?.191@308.9,31.875 J?.191@336.9,31.875 J?.191@364.9,31.875 J?.191@420.9,31.875 J?.191@448.9,31.875 J?.191@475.901,31.875 J?.192@29.25,63.2 J?.192@317.1,31.625 J?.192@345.1,31.625 J?.192@373.1,31.625 J?.192@401.1,31.625 J?.192@457.1,31.625 J?.192@484.101,31.625 J?.193@29,55 J?.193@308.9,31.375 J?.193@336.9,31.375 J?.193@364.9,31.375 J?.193@420.9,31.375 J?.193@448.9,31.375 J?.193@475.901,31.375 J?.194@28.75,63.2 J?.194@317.1,31.125 J?.194@345.1,31.125 J?.194@373.1,31.125 J?.194@401.1,31.125 J?.194@457.1,31.125 J?.194@484.101,31.125 J?.195@28.5,55 J?.195@308.9,30.875 J?.195@336.9,30.875 J?.195@364.9,30.875 J?.195@420.9,30.875 J?.195@448.9,30.875 J?.195@475.901,30.875 J?.196@28.25,63.2 J?.196@317.1,30.625 J?.196@345.1,30.625 J?.196@373.1,30.625 J?.196@401.1,30.625 J?.196@457.1,30.625 J?.196@484.101,30.625 J?.197@28,55 J?.197@308.9,30.375 J?.197@336.9,30.375 J?.197@364.9,30.375 J?.197@420.9,30.375 J?.197@448.9,30.375 J?.197@475.901,30.375 J?.198@27.75,63.2 J?.198@317.1,30.125 J?.198@345.1,30.125 J?.198@373.1,30.125 J?.198@401.1,30.125 J?.198@457.1,30.125 J?.198@484.101,30.125 J?.199@27.5,55 J?.199@308.9,29.875 J?.199@336.9,29.875 J?.199@364.9,29.875 J?.199@420.9,29.875 J?.199@448.9,29.875 J?.199@475.901,29.875 J?.200@27.25,63.2 J?.200@317.1,29.625 J?.200@345.1,29.625 J?.200@373.1,29.625 J?.200@401.1,29.625 J?.200@457.1,29.625 J?.200@484.101,29.625 J?.201@27,55 J?.201@308.9,29.375 J?.201@336.9,29.375 J?.201@364.9,29.375 J?.201@420.9,29.375 J?.201@448.9,29.375 J?.201@475.901,29.375 J?.202@26.75,63.2 J?.202@317.1,29.125 J?.202@345.1,29.125 J?.202@373.1,29.125 J?.202@401.1,29.125 J?.202@457.1,29.125 J?.202@484.101,29.125 J?.203 J?.204@26.25,63.2 J?.204@317.1,28.625 J?.204@345.1,28.625 J?.204@373.1,28.625 J?.204@401.1,28.625 J?.204@457.1,28.625 J?.204@484.101,28.625 J?.205 J?.206@25.75,63.2 J?.206@317.1,28.125 J?.206@345.1,28.125 J?.206@373.1,28.125 J?.206@401.1,28.125 J?.206@457.1,28.125 J?.206@484.101,28.125 J?.207 J?.208@25.25,63.2 J?.208@317.1,27.625 J?.208@345.1,27.625 J?.208@373.1,27.625 J?.208@401.1,27.625 J?.208@457.1,27.625 J?.208@484.101,27.625 J?.209 J?.210@24.75,63.2 J?.210@317.1,27.125 J?.210@345.1,27.125 J?.210@373.1,27.125 J?.210@401.1,27.125 J?.210@457.1,27.125 J?.210@484.101,27.125 J?.211@24.5,55 J?.211@308.9,26.875 J?.211@336.9,26.875 J?.211@364.9,26.875 J?.211@420.9,26.875 J?.211@448.9,26.875 J?.211@475.901,26.875 J?.212@24.25,63.2 J?.212@317.1,26.625 J?.212@345.1,26.625 J?.212@373.1,26.625 J?.212@401.1,26.625 J?.212@457.1,26.625 J?.212@484.101,26.625 J?.213@24,55 J?.213@308.9,26.375 J?.213@336.9,26.375 J?.213@364.9,26.375 J?.213@420.9,26.375 J?.213@448.9,26.375 J?.213@475.901,26.375 J?.214@23.75,63.2 J?.214@317.1,26.125 J?.214@345.1,26.125 J?.214@373.1,26.125 J?.214@401.1,26.125 J?.214@457.1,26.125 J?.214@484.101,26.125 J?.215@23.5,55 J?.215@308.9,25.875 J?.215@336.9,25.875 J?.215@364.9,25.875 J?.215@420.9,25.875 J?.215@448.9,25.875 J?.215@475.901,25.875 J?.216@23.25,63.2 J?.216@317.1,25.625 J?.216@345.1,25.625 J?.216@373.1,25.625 J?.216@401.1,25.625 J?.216@457.1,25.625 J?.216@484.101,25.625 J?.217@23,55 J?.217@308.9,25.375 J?.217@336.9,25.375 J?.217@364.9,25.375 J?.217@420.9,25.375 J?.217@448.9,25.375 J?.217@475.901,25.375 J?.218@22.75,63.2 J?.218@317.1,25.125 J?.218@345.1,25.125 J?.218@373.1,25.125 J?.218@401.1,25.125 J?.218@457.1,25.125 J?.218@484.101,25.125 J?.219 J?.220 J?.221 J?.222 J?.223 J?.224 J?.225 J?.226 J?.227 J?.228@20.25,63.2 J?.228@317.1,22.625 J?.228@345.1,22.625 J?.228@373.1,22.625 J?.228@401.1,22.625 J?.228@457.1,22.625 J?.228@484.101,22.625 J?.229 J?.230@19.75,63.2 J?.230@317.1,22.125 J?.230@345.1,22.125 J?.230@373.1,22.125 J?.230@401.1,22.125 J?.230@457.1,22.125 J?.230@484.101,22.125 J?.231@19.5,55 J?.231@308.9,21.875 J?.231@336.9,21.875 J?.231@364.9,21.875 J?.231@420.9,21.875 J?.231@448.9,21.875 J?.231@475.901,21.875 J?.232 J?.233@19,55 J?.233@308.9,21.375 J?.233@336.9,21.375 J?.233@364.9,21.375 J?.233@420.9,21.375 J?.233@448.9,21.375 J?.233@475.901,21.375 J?.234 J?.235@18.5,55 J?.235@308.9,20.875 J?.235@336.9,20.875 J?.235@364.9,20.875 J?.235@420.9,20.875 J?.235@448.9,20.875 J?.235@475.901,20.875 J?.236@18.25,63.2 J?.236@317.1,20.625 J?.236@345.1,20.625 J?.236@373.1,20.625 J?.236@401.1,20.625 J?.236@457.1,20.625 J?.236@484.101,20.625 J?.237@18,55 J?.237@308.9,20.375 J?.237@336.9,20.375 J?.237@364.9,20.375 J?.237@420.9,20.375 J?.237@448.9,20.375 J?.237@475.901,20.375 J?.238@17.75,63.2 J?.238@317.1,20.125 J?.238@345.1,20.125 J?.238@373.1,20.125 J?.238@401.1,20.125 J?.238@457.1,20.125 J?.238@484.101,20.125 J?.239@17.5,55 J?.239@308.9,19.875 J?.239@336.9,19.875 J?.239@364.9,19.875 J?.239@420.9,19.875 J?.239@448.9,19.875 J?.239@475.901,19.875 J?.240@17.25,63.2 J?.240@317.1,19.625 J?.240@345.1,19.625 J?.240@373.1,19.625 J?.240@401.1,19.625 J?.240@457.1,19.625 J?.240@484.101,19.625 J?.241@17,55 J?.241@308.9,19.375 J?.241@336.9,19.375 J?.241@364.9,19.375 J?.241@392.9,19.375 J?.241@420.9,19.375 J?.241@475.901,19.375 J?.242@16.75,63.2 J?.242@317.1,19.125 J?.242@345.1,19.125 J?.242@373.1,19.125 J?.242@401.1,19.125 J?.242@429.1,19.125 J?.242@457.1,19.125 J?.243@16.5,55 J?.243@308.9,18.875 J?.243@336.9,18.875 J?.243@364.9,18.875 J?.243@392.9,18.875 J?.243@420.9,18.875 J?.243@475.901,18.875 J?.244@16.25,63.2 J?.244@317.1,18.625 J?.244@345.1,18.625 J?.244@373.1,18.625 J?.244@401.1,18.625 J?.244@429.1,18.625 J?.244@457.1,18.625 J?.245@16,55 J?.245@308.9,18.375 J?.245@336.9,18.375 J?.245@364.9,18.375 J?.245@392.9,18.375 J?.245@420.9,18.375 J?.245@475.901,18.375 J?.246@15.75,63.2 J?.246@317.1,18.125 J?.246@345.1,18.125 J?.246@373.1,18.125 J?.246@401.1,18.125 J?.246@429.1,18.125 J?.246@457.1,18.125 J?.247@15.5,55 J?.247@308.9,17.875 J?.247@336.9,17.875 J?.247@364.9,17.875 J?.247@392.9,17.875 J?.247@420.9,17.875 J?.247@475.901,17.875 J?.248@15.25,63.2 J?.248@317.1,17.625 J?.248@345.1,17.625 J?.248@373.1,17.625 J?.248@401.1,17.625 J?.248@429.1,17.625 J?.248@457.1,17.625 J?.249@15,55 J?.249@308.9,17.375 J?.249@336.9,17.375 J?.249@364.9,17.375 J?.249@392.9,17.375 J?.249@420.9,17.375 J?.249@475.901,17.375 J?.250@14.75,63.2 J?.250@317.1,17.125 J?.250@345.1,17.125 J?.250@373.1,17.125 J?.250@401.1,17.125 J?.250@429.1,17.125 J?.250@457.1,17.125 J?.251@14.5,55 J?.251@308.9,16.875 J?.251@336.9,16.875 J?.251@364.9,16.875 J?.251@392.9,16.875 J?.251@420.9,16.875 J?.251@475.901,16.875 J?.252@14.25,63.2 J?.252@317.1,16.625 J?.252@345.1,16.625 J?.252@373.1,16.625 J?.252@401.1,16.625 J?.252@429.1,16.625 J?.252@457.1,16.625 J?.253@14,55 J?.253@308.9,16.375 J?.253@336.9,16.375 J?.253@364.9,16.375 J?.253@392.9,16.375 J?.253@420.9,16.375 J?.253@475.901,16.375 J?.254@13.75,63.2 J?.254@317.1,16.125 J?.254@345.1,16.125 J?.254@373.1,16.125 J?.254@401.1,16.125 J?.254@429.1,16.125 J?.254@457.1,16.125 J?.255@13.5,55 J?.255@308.9,15.875 J?.255@336.9,15.875 J?.255@364.9,15.875 J?.255@392.9,15.875 J?.255@420.9,15.875 J?.255@475.901,15.875 J?.256@13.25,63.2 J?.256@317.1,15.625 J?.256@345.1,15.625 J?.256@373.1,15.625 J?.256@401.1,15.625 J?.256@429.1,15.625 J?.256@457.1,15.625 J?.257@13,55 J?.257@308.9,15.375 J?.257@336.9,15.375 J?.257@364.9,15.375 J?.257@392.9,15.375 J?.257@420.9,15.375 J?.257@475.901,15.375 J?.258@12.75,63.2 J?.258@317.1,15.125 J?.258@345.1,15.125 J?.258@373.1,15.125 J?.258@401.1,15.125 J?.258@429.1,15.125 J?.258@457.1,15.125 J?.259@12.5,55 J?.259@308.9,14.875 J?.259@336.9,14.875 J?.259@364.9,14.875 J?.259@392.9,14.875 J?.259@420.9,14.875 J?.259@475.901,14.875 J?.260@12.25,63.2 J?.260@317.1,14.625 J?.260@345.1,14.625 J?.260@373.1,14.625 J?.260@401.1,14.625 J?.260@429.1,14.625 J?.260@457.1,14.625 J?.261@7.875,67.1 J?.261@321,10.25 J?.261@349,10.25 J?.261@377,10.25 J?.261@405,10.25 J?.261@433,10.25 J?.261@488.001,10.25 J?.262@83.375,71.1 J?.262@325,85.75 J?.262@353,85.75 J?.262@381,85.75 J?.262@409,85.75 J?.262@437,85.75 J?.262@465,85.75 J?.G1 J?.G2 J?.G3 J?.G4 J?_FAN_IF_0. J?_FAN_IF_1. Q?.1@197.05,87.65 Q?.1@399.05,4.65 Q?.2@197.05,87 Q?.2@314.05,3.35 Q?.2@412.05,3.35 Q?.2@451.05,3.35 Q?.3@183.95,169 Q?.3@188.95,259 Q?.3@192.05,86.35 Q?.3@201.95,169 Q?.3@227.95,169 Q?.3@256.95,169 Q?.3@264.95,87 Q?.3@273.95,169 Q?.3@413.95,4 Q?.4@193.95,86.35 Q?.5@193.95,87 Q?.6@198.95,87.65 Q?_RAIL_DISCH_0.1@206.35,333.05 Q?_RAIL_DISCH_0.2@207,333.05 Q?_RAIL_DISCH_0.3@183.65,333.05 Q?_RAIL_DISCH_0.4@183.65,334.95 Q?_RAIL_DISCH_0.5@183,334.95 Q?_RAIL_DISCH_0.6@206.35,334.95 Q?_RAIL_DISCH_1.1@205.35,348.05 Q?_RAIL_DISCH_1.2@206,348.05 Q?_RAIL_DISCH_1.3@183.65,348.05 Q?_RAIL_DISCH_1.4@183.65,349.95 Q?_RAIL_DISCH_1.5@183,349.95 Q?_RAIL_DISCH_1.6@205.35,349.95 Q?_RAIL_DISCH_2.1@206.35,363.05 Q?_RAIL_DISCH_2.2@207,363.05 Q?_RAIL_DISCH_2.3@183.65,363.05 Q?_RAIL_DISCH_2.4@183.65,364.95 Q?_RAIL_DISCH_2.5@183,364.95 Q?_RAIL_DISCH_2.6@206.35,364.95 R?.1@186.375,170 R?.1@190.5,224 R?.1@191.5,6 R?.1@191.5,260 R?.1@195.35,170 R?.1@196.275,260 R?.1@204.375,170 R?.1@212.35,170 R?.1@228.275,5 R?.1@230.375,170 R?.1@246.5,6 R?.1@250.35,170 R?.1@259.375,170 R?.1@267.35,170 R?.1@267.375,88 R?.1@276.35,88 R?.1@276.375,170 R?.1@285.35,170 R?.1@344.275,5 R?.1@395.275,5 R?.1@416.5,6 R?.1@421.35,6 R?.1@425.375,6 R?.1@460.35,6 R?.2@183.5,224 R?.2@187.625,170 R?.2@191.5,224 R?.2@192.5,260 R?.2@196.5,224 R?.2@200.5,224 R?.2@204.5,224 R?.2@205.625,170 R?.2@231.625,170 R?.2@260.625,170 R?.2@262.5,224 R?.2@262.513,6 R?.2@277.625,170 R?.2@281.513,6 R?.2@286.5,224 R?.2@290.5,224 R?.2@299.5,224 R?.2@300.513,6 R?.2@303.5,224 R?.2@307.5,224 R?.2@312.5,224 R?.2@316.5,224 R?.2@319.513,6 R?.2@334.513,6 R?.2@353.513,6 R?.2@363.513,6 R?.2@387.725,5 R?_FAN_IF_0.1@360,307.5 R?_FAN_IF_1.1@355,322.5 U1_DES_0.1 U1_DES_0.2 U1_DES_0.3 U1_DES_0.12 U1_DES_0.26 U1_DES_0.27 U1_DES_0.33 U1_DES_0.34 U1_DES_0.51 U1_DES_0.52 U1_DES_1.1 U1_DES_1.2 U1_DES_1.3 U1_DES_1.12 U1_DES_1.26 U1_DES_1.27 U1_DES_1.33 U1_DES_1.34 U1_DES_1.51 U1_DES_1.52 U?.1@236.875,4.65 U?.1@294.875,4.65 U?.1@411.23,169.65 U?.1@446.23,169.65 U?.6@239.125,4.65 U?_FAN_IF_0.1 U?_FAN_IF_1.1 Y?.1 Y?.3 Y?.4
copper on no net:
  other v4: 93.45,112.15 93.45,114.15

## Polygon pours and split planes (outlines as drawn)
DES_1V2_DES_1 on Top Layer "DES_1V2_DES_1_L01_P002" (solid, remove dead copper, pour order 2): 47.5,91.5 50.75,91.5 50.75,92.5 52.75,92.5 52.75,90 50.75,90 50.75,90.5 47.5,90.5
DES_1V2_DES_0 on Top Layer "DES_1V2_DES_0_L01_P001" (solid, remove dead copper, pour order 1): 9.5,91.5 12.75,91.5 12.75,92.5 14.75,92.5 14.75,90 12.75,90 12.75,90.5 9.5,90.5